# Altium PCB Mach_driver.PcbDoc
Units mm, origin at the board's own origin, x right, y up, seen from the top; angles counter-clockwise.
Board outline 152.4 x 101.6 mm, 2 copper layers (Top Layer, Bottom Layer); 76 components, 33 nets, 233 pads, 88 vias.
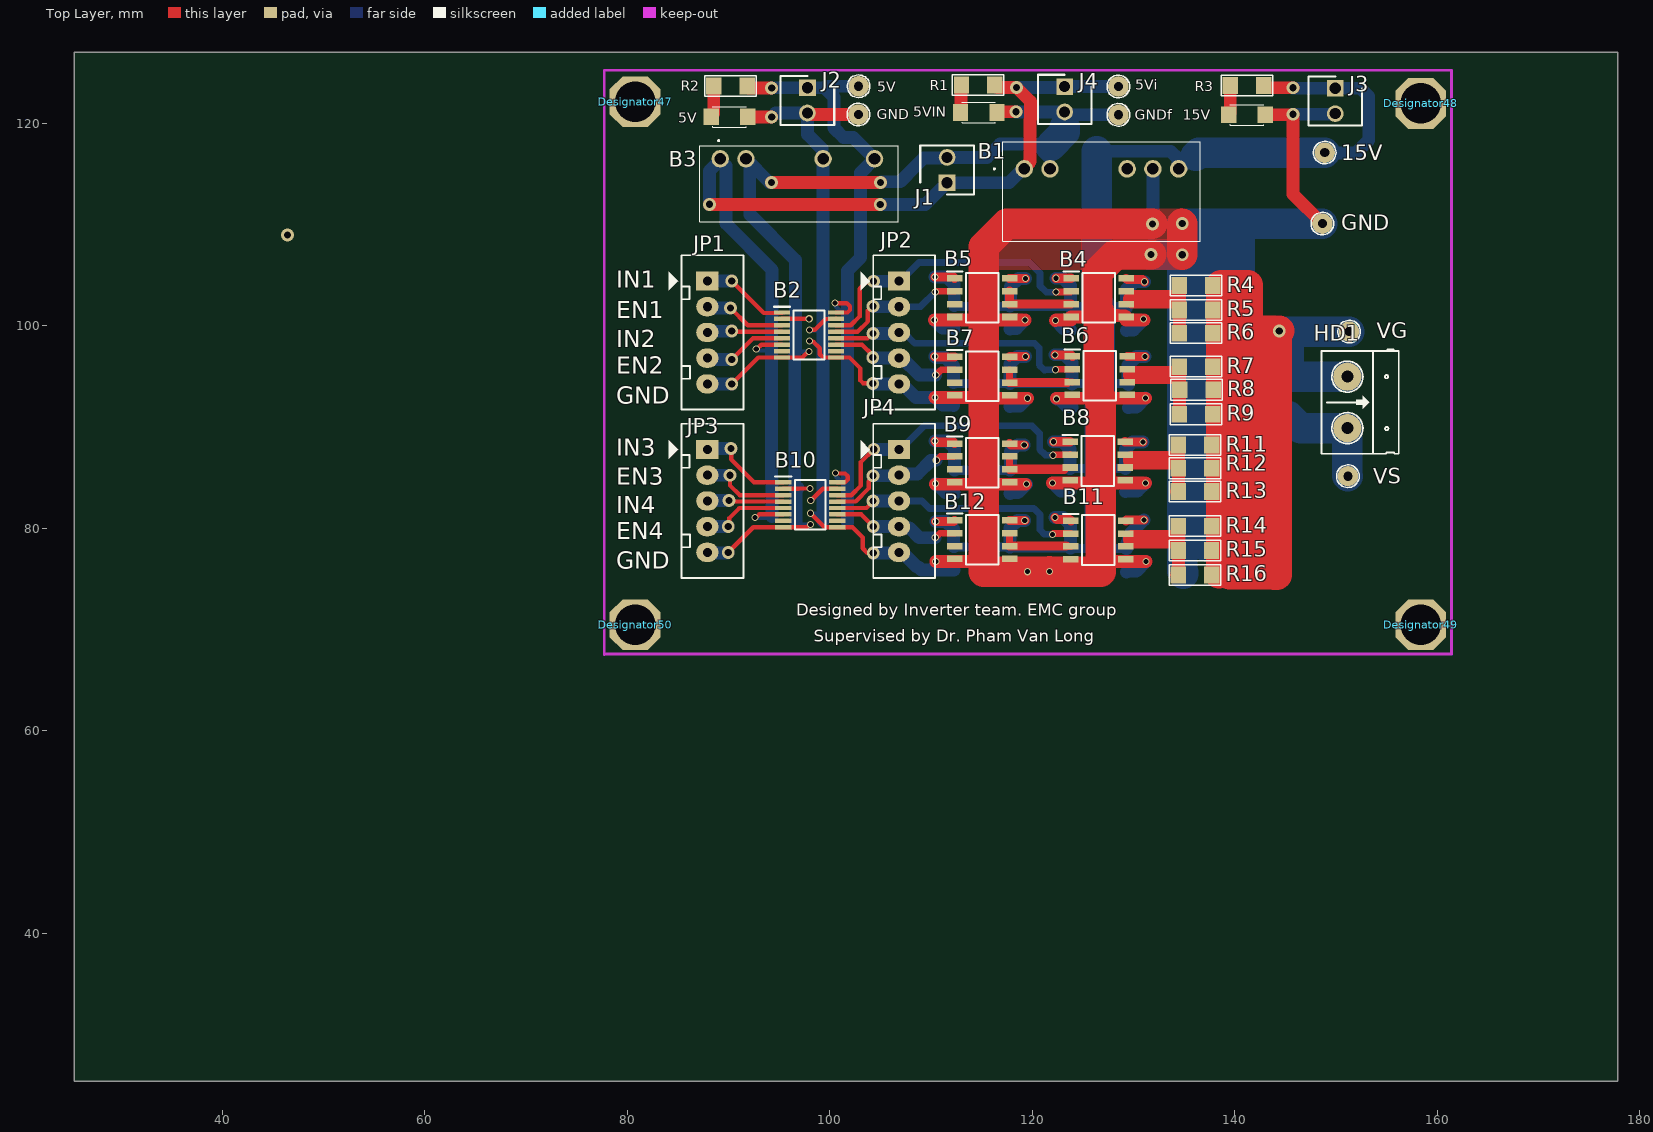
[diagram p0: Top Layer view]
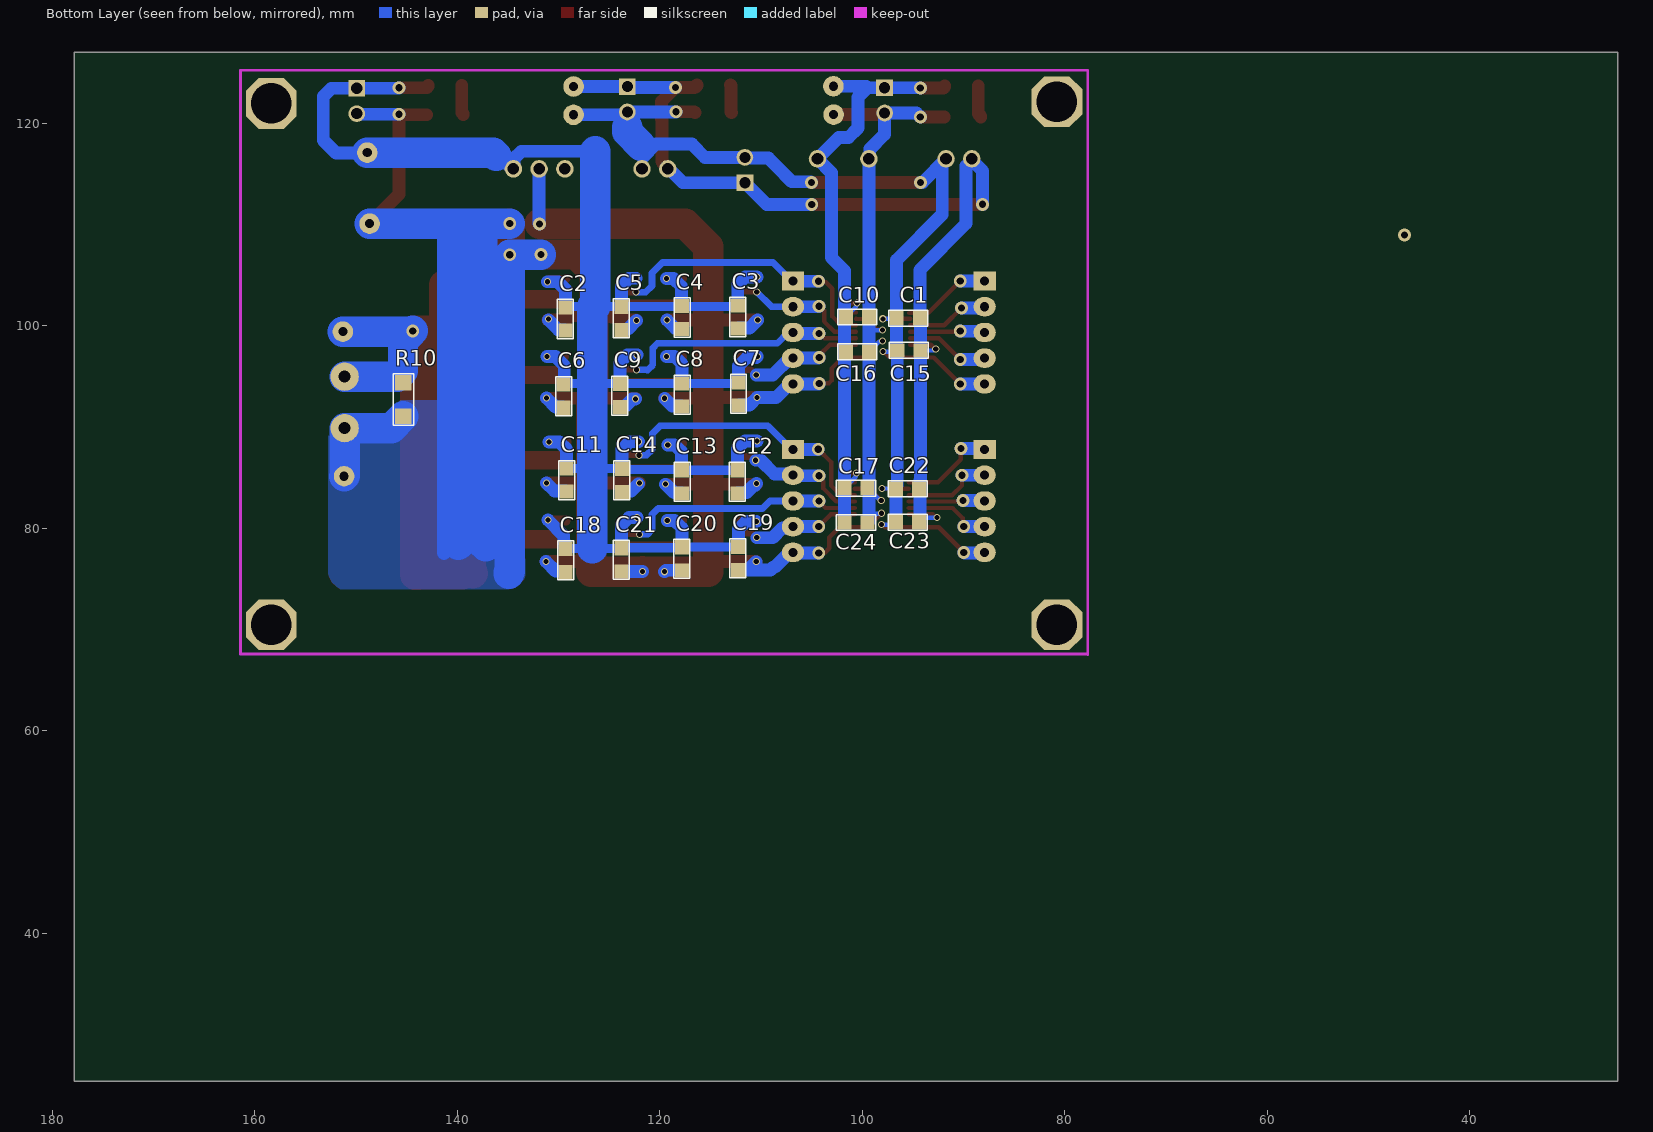
[diagram p1: Bottom Layer view, seen from below]
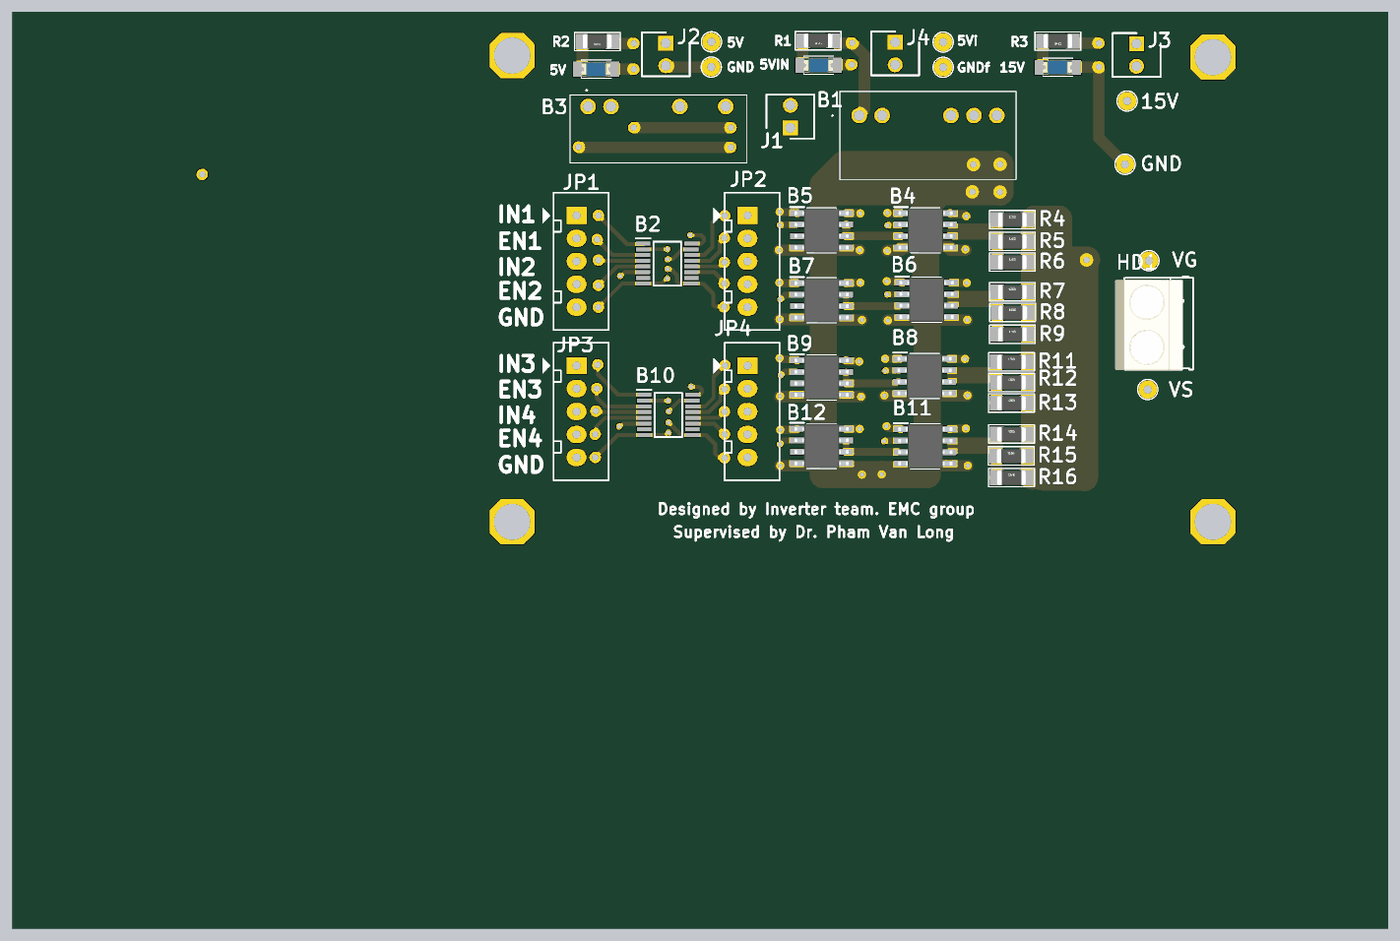
[diagram p2: 3D render of the assembled board from above, using the file's embedded part models]
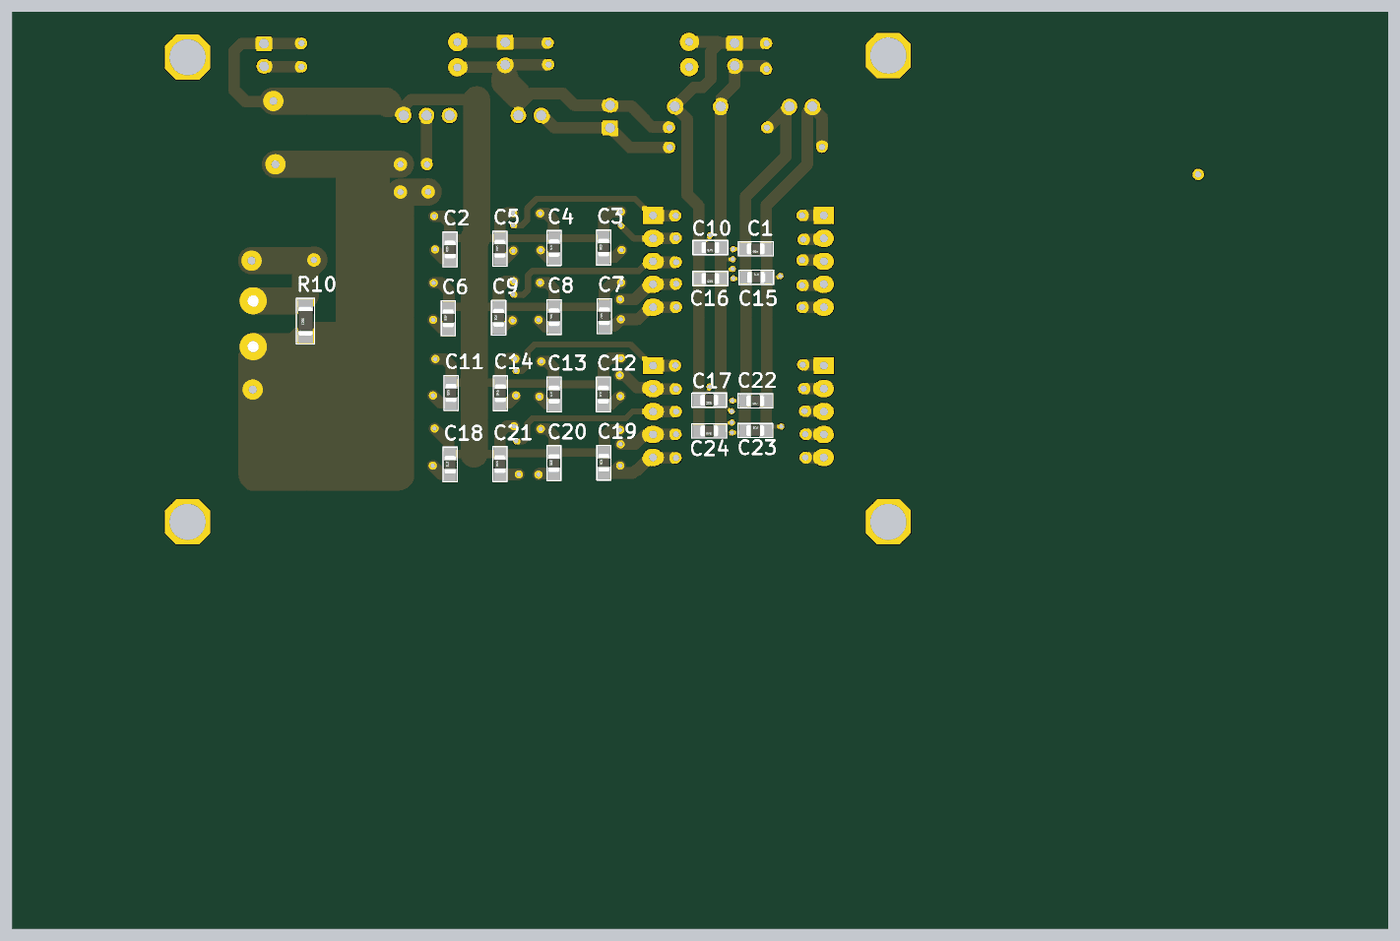
[diagram p3: 3D render of the assembled board from below, using the file's embedded part models]

## Layer stack, top to bottom
Top Solder: solder mask 0.0102, Solder Resist, Dk 3.5
Top Layer: signal copper 0.0356
Dielectric 1: dielectric 0.32, FR-4, Dk 4.8
Bottom Layer: signal copper 0.0356
Bottom Solder: solder mask 0.0102, Solder Resist, Dk 3.5

## Board outline
25.4,25.4 177.8,25.4 177.8,127 25.4,127

## Design rules (kind name [scope] priority, off if disabled: settings)
Clearance Clearance_1 [InPolygon] p1: gap=0.4 ignorepadtopadclearanceinfootprint=FALSE
Clearance [All] p2: gap=0.15 ignorepadtopadclearanceinfootprint=FALSE
PolygonConnect [All] p1: connectstyle=Relief reliefconductorwidth=0.254 reliefentries=4 polygonreliefangle="90 Angle" airgapwidth=0.254
RoutingVias [All] p1: holewidth=0.711 width=1.27 viastyle="Through Hole" minholewidth=0.711 minwidth=1.27 maxholewidth=0.711 maxwidth=1.27
SolderMaskExpansion [All] p1: expansion=0.102 istentingtop=FALSE
Width Width_1 [All] p1: maxlimit=3 minlimit=0.67 preferedwidth=1.27
Width Width_0.9 [All] p2: maxlimit=3 minlimit=0.9 preferedwidth=1.27
30 further rules are at their usual default settings.

## Classes and differential pairs
component class Mach_driver: 5V 5Vi 5VIN 15V B1 B2 B3 B4 B5 B6 B7 B8 B9 B10 B11 B12 C1 C2 C3 C4 C5 C6 C7 C8 C9 C10 C11 C12 C13 C14 C15 C16 C17 C18 C19 C20 C21 C22 C23 C24 GND GNDf HD1 J1 J2 J3 J4 JP1 JP2 JP3 JP4 R1 R2 R3 R4 R5 R6 R7 R8 R9 R10 R11 R12 R13 R14 R15 R16 VG VS

## Components (designator, comment, footprint, x,y, rotation, side; value= is the part's Value field where it differs from the comment)
5V "TP" TP1 102.845,123.647 r0 top value="Test Point"
5V "LED SMD" SM-LED-1206-Blue 88.29,120.625 r0 top
5Vi "TP" TP1 128.499,123.622 r0 top value="Test Point"
5VIN "LED SMD" SM-LED-1206-Blue 112.903,121.056 r0 top
15V "TP" TP1 148.869,117.094 r0 top value="Test Point"
15V "LED SMD" SM-LED-1206-Blue 139.395,120.828 r0 top
B1 "MGJ2D151505SC" MGJ2D151505SC 119.202,115.494 r0 top
B2 "IL260-1E" SOP64P600X175-16N 97.942,99.085 r0 top
B3 "RKZ3-2412S" RKZ32412S 89.179,116.484 r0 top
B4 "IXDD609SIA" SOIC127P600X175-8N 126.543,102.768 r0 top
B5 "IXDD609SIA" SOIC127P600X175-8N 115.037,102.768 r0 top
B6 "IXDD609SIA" SOIC127P600X175-8N 126.67,95.072 r0 top
B7 "IXDD609SIA" SOIC127P600X175-8N 115.037,95.021 r0 top
B8 "IXDD609SIA" SOIC127P600X175-8N 126.441,86.639 r0 top
B9 "IXDD609SIA" SOIC127P600X175-8N 115.037,86.462 r0 top
B10 "IL260-1E" SOP64P600X175-16N 98.069,82.321 r0 top
B11 "IXDD609SIA" SOIC127P600X175-8N 126.517,78.842 r0 top
B12 "IXDD609SIA" SOIC127P600X175-8N 115.037,78.879 r0 top
C1 "1uF" SM-0805 95.453,100.736 r180 bottom
C2 "1uF" SM-0805 129.311,100.66 r270 bottom
C3 "1uF" SM-0805 112.293,100.863 r270 bottom
C4 "1uF" SM-0805 117.78,100.813 r270 bottom
C5 "1uF" SM-0805 123.774,100.736 r270 bottom
C6 "1uF" SM-0805 129.489,93.04 r270 bottom
C7 "1uF" SM-0805 112.217,93.269 r270 bottom
C8 "1uF" SM-0805 117.78,93.167 r270 bottom
C9 "1uF" SM-0805 123.927,93.091 r270 bottom
C10 "1uF" SM-0805 100.482,100.863 r180 bottom
C11 "1uF" SM-0805 129.184,84.76 r270 bottom
C12 "1uF" SM-0805 112.319,84.582 r270 bottom
C13 "1uF" SM-0805 117.78,84.582 r270 bottom
C14 "1uF" SM-0805 123.723,84.734 r270 bottom
C15 "1uF" SM-0805 95.402,97.561 r0 bottom
C16 "1uF" SM-0805 100.482,97.434 r180 bottom
C17 "1uF" SM-0805 100.609,83.972 r180 bottom
C18 "1uF" SM-0805 129.286,76.835 r270 bottom
C19 "1uF" SM-0805 112.268,77.038 r270 bottom
C20 "1uF" SM-0805 117.805,76.987 r270 bottom
C21 "1uF" SM-0805 123.774,76.886 r270 bottom
C22 "1uF" SM-0805 95.504,83.896 r180 bottom
C23 "1uF" SM-0805 95.504,80.594 r0 bottom
C24 "1uF" SM-0805 100.609,80.569 r180 bottom
Designator47 "Comment" VIT 80.772,122.123 r0 top
Designator48 "Comment" VIT 158.369,121.945 r0 top
Designator49 "Comment" VIT 158.369,70.485 r0 top
Designator50 "Comment" VIT 80.772,70.485 r0 top
GND "TP" TP1 148.641,110.084 r90 top value="Test Point"
GND "TP" TP1 102.819,120.853 r0 top value="Test Point"
GNDf "TP" TP1 128.499,120.828 r0 top value="Test Point"
HD1 "Header 2" HED2 151.105,94.971 r270 top
J1 "22-11-1021" HDRV2W64P0X250_1X2_450X490X1105P 111.582,114.122 r90 top
J2 "22-11-1021" HDRV2W64P0X250_1X2_450X490X1105P 97.79,123.506 r270 top
J3 "22-11-1021" HDRV2W64P0X250_1X2_450X490X1105P 149.911,123.444 r270 top
J4 "22-11-1021" HDRV2W64P0X250_1X2_450X490X1105P 123.19,123.607 r270 top
JP1 "JP5" CON5 87.909,104.419 r270 top value="Connector 5"
JP2 "JP5" CON5 106.832,104.419 r270 top value="Connector 5"
JP3 "JP5" CON5 87.909,87.782 r270 top value="Connector 5"
JP4 "JP5" CON5 106.832,87.782 r270 top value="Connector 5"
R1 "2k" SM-1206 114.656,123.774 r180 top value=1K
R2 "2k" SM-1206 90.195,123.673 r180 top value=1K
R3 "2k" SM-1206 141.199,123.723 r180 top value=1K
R4 "1K" SM-1206 136.169,103.962 r0 top
R5 "1K" SM-1206 136.169,101.549 r0 top
R6 "1K" SM-1206 136.169,99.263 r0 top
R7 "1K" SM-1206 136.169,95.961 r0 top
R8 "1K" SM-1206 136.195,93.675 r0 top
R9 "1K" SM-1206 136.169,91.262 r0 top
R10 "5k1" SM-1206 145.313,92.71 r90 bottom value=1K
R11 "1K" SM-1206 136.068,88.214 r0 top
R12 "1K" SM-1206 136.068,85.928 r0 top
R13 "1K" SM-1206 136.068,83.642 r0 top
R14 "1K" SM-1206 136.068,80.213 r0 top
R15 "1K" SM-1206 136.042,77.8 r0 top
R16 "1K" SM-1206 136.068,75.387 r0 top
VG "TP" TP1 151.282,99.416 r0 top value="Test Point"
VS "TP" TP1 151.155,85.141 r0 top value="Test Point"

## Footprints (in the part's own frame and the unit in brackets; to place one, negate y for a bottom-side part, rotate by r counter-clockwise, add the part's x,y. Pads: shape width x height; smd on the part's side, far side on the other; paste and mask are expansions set on the pad)
CON5 [mm] "CON5"
  rect 1.9x2.2 hole 0.9: 1(0,0)
  oval 1.9x2.2 hole 0.9: 2(2.54,0) 3(5.08,0) 4(7.62,0) 5(10.16,0)
  silkscreen extent -2.54,-3.8 12.7,3.56
HDRV2W64P0X250_1X2_450X490X1105P [mm]
  rect 1.65x1.65 / inner round 1.65 / far side rect 1.65x1.65 hole 1.1: 1(0,0)
  round 1.65 hole 1.1: 2(2.5,0)
  silkscreen extent -1.17,-2.65 3.67,2.65
HED2 [mm] "Header 2, 2 pin, hight 300mil, Pin to Pin 200, Colour Green"
  round 2.8 hole 1.2: 1(0,0) 2(5.08,0)
  silkscreen extent -2.69,-2.54 7.62,5.08, body extent -2.33,-3.56 7.67,3.94, height 10
MGJ2D151505SC [mm]
  round 1.725 hole 1.15: 1(0,0) 2(2.54,0) 5(10.16,0) 6(12.7,0) 7(15.24,0)
  silkscreen extent -3,-7.13 17.37,2.67
RKZ32412S [mm]
  round 1.725 hole 1.15: 1(0,0) 2(2.54,0) 5(10.16,0) 7(15.24,0)
  silkscreen extent -2,-6.23 17.6,1.85
SM-0805 [mil] "Compoment SMD 80x50mil"
  rect 55x55 smd: 1(-45,0) 2(45,0)
  silkscreen extent -76,-31 76,31, body extent -39,-25 39,25, height 31
SM-1206 [mil] "Compoment SMD 120x60mil"
  rect 60x65 smd: 1(-65,0) 2(65,0)
  silkscreen extent -100,-40 100,40, body extent -63,-32 63,31, height 39
SM-LED-1206-Blue [mil] "Compoment SMD 120x60mil"
  rect 60x65 smd: 1(0,0) 2(142,0)
  silkscreen extent 6,-40 136,40, body extent 7,-31 133,32, height 43
SOIC127P600X175-8N [mm]
  rect 1.525x0.65 smd: 1(-2.712,1.905) 2(-2.712,0.635) 3(-2.712,-0.635) 4(-2.712,-1.905) 5(2.712,-1.905) 6(2.712,-0.635) 7(2.712,0.635) 8(2.712,1.905)
  silkscreen extent -3.47,-2.45 1.6,2.58, body extent -3,-2.45 3,2.45, height 1.75
SOP64P600X175-16N [mm]
  rect 1.6x0.435 smd: 1(-2.675,2.222) 2(-2.675,1.588) 3(-2.675,0.952) 4(-2.675,0.318) 5(-2.675,-0.318) 6(-2.675,-0.952) 7(-2.675,-1.588) 8(-2.675,-2.222) 9(2.675,-2.222) 10(2.675,-1.588) 11(2.675,-0.952) 12(2.675,-0.318) 13(2.675,0.318) 14(2.675,0.952) 15(2.675,1.588) 16(2.675,2.222)
  silkscreen extent -3.47,-2.44 1.53,2.79
TP1 [mil] "Test point"
  round 80 hole 35.43: 1(0,0)
  silkscreen extent -44,-44 44,44
VIT [mm] "VIT"
  oct 5x5 hole 4: 1(0,0)

## Part data
5V 5Vi 15V GND GND GNDf VG VS: library part TP1, "Test Point"
5V 5VIN 15V: library part LED-SMD-1206
B1: "DC/DC Converters", Manufacturer_Name="Murata Electronics", RS Part Number=8163516P, Datasheet Link=http://uk.rs-online.com/web/p/products/8163516P, Geometry.Height=12.75mm, Manufacturer_Part_Number=MGJ2D151505SC, RS Price/Stock=http://uk.rs-online.com/web/p/products/8163516P
B2 B10: "High Speed Five-Channel Digital Isolator, 110Mbps, unidirectional", Manufacturer_Name=NVE, Datasheet Link=https://www.nve.com/Downloads/il260-1.pdf, Geometry.Height=1.75mm, Manufacturer_Part_Number=IL260-1E
B3: "Isolated DC/DC Converters 3W 24Vin 12Vout 250mA SIP7", Manufacturer_Name="RECOM Power", RS Part Number=1655090P, Datasheet Link=http://uk.rs-online.com/web/p/products/1655090P, Geometry.Height=12.2mm, Manufacturer_Part_Number=RKZ3-2412S, RS Price/Stock=http://uk.rs-online.com/web/p/products/1655090P
B4 B5 B6 B7 B8 B9 B11 B12: "Gate Drivers 9-Ampere Low-Side Ultrafast MOSFET", Manufacturer_Name=LITTELFUSE, Datasheet Link=http://www.ixysic.com/home/pdfs.nsf/www/IXD_609.pdf/$file/IXD_609.pdf, Geometry.Height=1.75mm, Manufacturer_Part_Number=IXDD609SIA
C1 C2 C3 C4 C5 C6 C7 C8 C9 C10 C11 C12 C13 C14 C15 C16 C17 C18 C19 C20 C21 C22 C23 C24: library part C0805, "CapacitorStandard 0805 ceramic capacitor"
HD1: library part Hed2, "Header 2 (Green)"
J1 J2 J3 J4: "Headers & Wire Housings KK2.5MM FL WAF.ASS. GOLD 504502AG", Manufacturer_Name=Molex, Allied_Number=70777791, Datasheet Link=https://www.molex.com/pdm_docs/sd/022111021_sd.pdf, Geometry.Height=11.05mm, Manufacturer_Part_Number=22-11-1021
JP1 JP2 JP3 JP4: library part Con5, "Connector 5"
R1 R2 R3 R4 R5 R6 R7 R8 R9 R10 R11 R12 R13 R14 R15 R16: library part RM, "Resistor SMD"

## Via types
v1: diameter 0.7, hole 0.5, Top Layer to Bottom Layer, 52 vias
v2: diameter 1.27, hole 0.711, Top Layer to Bottom Layer, 36 vias

## Nets (pads, with @x,y where several pads share a name; then routed paths per layer and width w, separated by ;. In a path a pad name is that pad's centre, name@x,y a point inside that pad or via, vN(x,y) a via of type N, cw(c..) or ccw(c..) an arc to the next point about the centre after c; other vN are vias at no path point)
5VDC: 5Vi.1 B1.1 B2.6 B3.1 B10.6 C1.2 C15.1 C22.2 C23.1 J1.1 J4.1 R1.1 | length 103.8
  Top Layer w0.43: v1(92.631,81.048) 92.704,81.048 93.025,81.369 B10.6 ; v1(92.735,97.714) 92.808,97.714 93.228,98.133 B2.6
  Top Layer w1.27: v2(88.113,111.989) 88.138,111.963 v2(104.978,111.963) ; R1.1 116.307,123.711 116.434,123.584 116.497,123.584 116.561,123.52 v2(118.44,123.52) 119.809,122.151 119.809,120.399 119.786,120.376 119.786,116.201 119.202,115.617 B1.1
  Bottom Layer w0.43: v1(92.631,81.048) C23.1@93.907,81.048 ; v1(92.735,97.714) 92.808,97.714 92.961,97.561 C15.1
  Bottom Layer w1.27: v2(88.113,111.989) 88.113,115.294 89.179,116.361 B3.1 ; 89.738,115.802 89.738,110.084 94.31,105.512 C1.2 ; C1.2@94.259,100.686 C15.1 94.259,84.776 94.297,84.738 C22.2@94.297,83.833 ; C23.1@94.285,81.169 C22.2@94.285,83.82 ; v2(104.978,111.963) 109.423,111.963 J1.1 117.707,114.122 119.079,115.494 B1.1 B1.1@119.289,115.407 ; v2(118.44,123.52) 123.103,123.52 J4.1 123.197,123.615 128.491,123.615 5Vi.1
5VDC_ISO: 5V.1@102.845,123.647 B2.16 B3.7 B10.16 C10.1 C16.1 C17.1 C24.1 J2.1 R2.1 | length 67.9
  Top Layer w0.43: v1(100.508,102.235) 101.676,102.235 101.996,101.916 101.996,101.559 101.744,101.307 B2.16 ; v1(100.581,85.467) 100.633,85.416 101.503,85.416 101.767,85.152 101.767,84.82 101.493,84.546 100.747,84.546 B10.16
  Top Layer w1.27: R2.1 91.846,123.609 91.973,123.482 92.037,123.482 92.05,123.469 v2(94.259,123.469)
  Bottom Layer w0.43: v1(100.508,102.235) 100.559,102.183 100.559,101.929 C10.1 ; v1(100.581,85.467) 100.633,85.416 100.633,85.092 C17.1
  Bottom Layer w1.27: v2(94.259,123.469) 94.296,123.506 J2.1 99.481,123.506 ; C24.1 C17.1 101.752,105.435 103.048,106.731 103.048,115.113 B3.7 102.311,118.593 101.346,118.593 100.432,119.507 100.432,122.555 99.481,123.506 ; 5V.1@102.845,123.647 99.623,123.647 99.481,123.506
15VDC: 15V.1@148.869,117.094 B1.7 B4.1 B4.8 B5.1 B5.8 B6.1 B6.8 B7.1 B7.8 B8.1 B8.8 B9.1 B9.8 B11.1 B11.8 B12.1 B12.8 C2.1 C3.1 C4.1 C5.1 C6.1 C7.1 C8.1 C9.1 C11.1 C12.1 C13.1 C14.1 C18.1 C19.1 C20.1 C21.1 J3.1 R3.1 | length 242.4
  Top Layer w0.9: v1(110.363,96.977) 110.414,96.926 B7.1 ; v1(110.383,88.614) 110.505,88.492 112.2,88.492 B9.1 ; v1(110.388,104.826) 110.416,104.798 112.2,104.798 B5.1 ; v1(110.465,80.67) 112.211,80.67 B12.1 ; B12.8 117.761,80.772 v1(119.253,80.772) ; B9.8 117.874,88.242 119.2,88.242 v1(119.202,88.24) ; B7.8 117.799,96.977 v1(119.329,96.977) ; B5.8 117.774,104.648 v1(119.329,104.648) ; v1(122.072,88.544) B8.1 ; v1(122.225,81.077) 122.43,80.872 123.68,80.872 B11.1 ; v1(122.25,97.13) 122.278,97.102 123.833,97.102 B6.1 ; v1(122.323,104.688) 123.816,104.688 B4.1 ; B8.8 129.178,88.52 v1(130.925,88.52) ; B11.8 129.306,80.823 v1(131.013,80.823) ; B4.8 129.38,104.548 130.859,104.548 v1(131.064,104.343) ; B6.8 129.407,96.952 v1(131.115,96.952)
  Top Layer w1.27: R3.1 142.85,123.66 142.977,123.533 143.04,123.533 143.078,123.495 v2(145.745,123.495)
  Bottom Layer w0.9: C7.1 112.331,94.297 C9.1@123.927,94.297 ; C19.1 112.293,78.156 C20.1@117.78,78.156 ; C3.1 112.395,101.905 123.774,101.905 126.644,101.905 129.21,101.905 C2.1 ; C12.1 C13.1 ; C13.1@117.843,85.788 117.856,85.801 123.647,85.801 C14.1 123.736,85.89 126.644,85.89 129.172,85.89 C11.1 ; C20.1@117.856,78.08 123.723,78.08 C21.1 123.8,78.003 126.644,78.003 129.261,78.003 C18.1 ; C9.1@123.99,94.297 126.644,94.297 129.375,94.297 C6.1@129.426,94.247
  Bottom Layer w1.27: v1(110.363,96.977) 110.467,96.873 111.374,96.873 112.217,96.03 C7.1 ; v1(110.383,88.614) 111.575,88.614 112.319,87.87 C12.1 ; v1(110.388,104.826) 111.549,104.826 112.293,104.082 C3.1 ; v1(110.465,80.67) 111.461,80.67 112.204,79.926 112.204,78.245 C19.1 ; C13.1 117.843,85.788 117.843,86.287 117.856,86.3 117.856,87.572 118.524,88.24 v1(119.202,88.24) ; C8.1 117.78,96.233 118.524,96.977 v1(119.329,96.977) ; C4.1 117.843,102.019 117.843,103.873 118.618,104.648 v1(119.329,104.648) ; C20.1 117.805,80.028 118.549,80.772 v1(119.253,80.772) ; v1(122.072,88.544) 122.979,88.544 123.723,87.8 C14.1 ; v1(122.225,81.077) 123.03,81.077 123.774,80.333 C21.1 ; v1(122.25,97.13) 123.183,97.13 123.927,96.386 123.927,94.297 C9.1 ; v1(122.323,104.688) 123.03,104.688 123.774,103.944 123.774,101.905 C5.1 ; 126.365,117.229 133.654,117.229 134.355,116.528 134.355,115.581 B1.7 134.565,115.494 135.861,116.789 136.119,116.789 ; C11.1 129.184,87.8 129.904,88.52 v1(130.925,88.52) ; C18.1 129.35,78.041 129.35,78.54 129.464,78.655 129.464,79.273 v1(131.013,80.823) ; C2.1 129.311,103.599 130.055,104.343 v1(131.064,104.343) ; C6.1 129.426,94.247 129.426,96.075 130.302,96.952 v1(131.115,96.952) ; v2(145.745,123.495) 145.796,123.444 J3.1 152.4,123.444 153.213,122.631 153.213,118.313 151.943,117.043 148.92,117.043 15V.1@148.869,117.094
  Bottom Layer w3: 126.365,101.905 126.365,117.229 ; 126.644,78.003 126.644,85.89 126.644,94.297 126.644,101.905 ; 136.119,116.789 136.423,117.094 15V.1@148.869,117.094
EN1: B2.3 JP1.2 | length 8.1
  Top Layer w0.43: v2(90.195,101.752) 91.901,100.046 93.289,100.046 93.298,100.037 B2.3
  Bottom Layer w1.27: JP1.2 88.03,101.759 90.189,101.759 v2(90.195,101.752)
EN1_ISO: B2.13 B5.2 JP2.2 | length 14
  Top Layer w0.43: B2.13 102.731,99.403 103.759,100.432 103.759,101.498 104.191,101.93 v2(104.267,101.93)
  Top Layer w0.67: v1(110.411,103.342) 110.419,103.342 110.48,103.403 B5.2
  Bottom Layer w0.67: JP2.2 108.948,101.879 v1(110.411,103.342)
  Bottom Layer w1.27: v2(104.267,101.93) 104.318,101.879 JP2.2
EN2: B2.5 JP1.4 | length 8.3
  Top Layer w0.43: v2(90.322,96.672) 92.417,98.767 B2.5
  Bottom Layer w1.27: JP1.4 88.03,96.679 90.316,96.679 v2(90.322,96.672)
EN2_ISO: B2.11 B7.2 JP2.4 | length 13.3
  Top Layer w0.43: B2.11 103.187,98.133 104.242,97.079 v2(104.242,96.876)
  Top Layer w0.67: v1(110.465,95.123) 110.473,95.123 110.996,95.646 112.315,95.646 B7.2
  Bottom Layer w1.27: v2(104.242,96.876) 104.318,96.799 107.153,96.799 108.829,95.123 v1(110.465,95.123)
EN3: B10.3 JP3.2 | length 8.9
  Top Layer w0.43: v2(90.145,85.242) 90.145,84.226 91.098,83.273 B10.3
  Bottom Layer w1.27: JP3.2 v2(90.145,85.242)
EN3_ISO: B9.2 B10.13 JP4.2 | length 13.9
  Top Layer w0.43: B10.13 102.553,82.639 103.835,83.922 103.835,84.658 104.267,85.09 v2(104.267,85.192)
  Top Layer w0.67: v1(110.515,86.716) 110.524,86.716 110.905,87.097 B9.2
  Bottom Layer w1.27: v2(104.267,85.192) 106.782,85.192 JP4.2 106.953,85.363 108.655,85.363 110.007,86.716 v1(110.515,86.716)
EN4: B10.5 JP3.4 | length 8.7
  Top Layer w0.43: v2(89.967,80.188) 90.086,80.307 90.086,81.018 91.071,82.003 B10.5
  Bottom Layer w1.27: JP3.4 87.935,80.188 v2(89.967,80.188)
EN4_ISO: B10.11 B12.2 JP4.4 | length 12.7
  Top Layer w0.43: B10.11 103.111,81.369 v2(104.292,80.188)
  Top Layer w0.67: v1(110.414,79.07) 110.422,79.07 110.856,79.504 112.315,79.504 B12.2
  Bottom Layer w1.27: v2(104.292,80.188) 104.318,80.162 JP4.4 106.953,80.042 107.867,80.042 108.839,79.07 v1(110.414,79.07)
GND: 5V.2 15V.2 B1.6 B2.9 B2.15 B3.5 B4.4 B4.5 B5.4 B5.5 B6.4 B6.5 B7.4 B7.5 B8.4 B8.5 B9.4 B9.5 B10.9 B10.15 B11.4 B11.5 B12.4 B12.5 C2.2 C3.2 C4.2 C5.2 C6.2 C7.2 C8.2 C9.2 C10.2 C11.2 C12.2 C13.2 C14.2 C16.2 C17.2 C18.2 C19.2 C20.2 C21.2 C24.2 GND.1 HD1.2 J2.2 J3.2 JP2.5 JP4.5 R10.1 VS.1 | length 470.2
  Top Layer w0.43: v1(97.993,98.501) 98.045,98.45 98.35,98.45 99.008,97.791 99.008,97.182 99.324,96.866 100.615,96.866 B2.9 100.62,96.861 101.945,96.861 103.022,95.783 103.022,94.59 103.274,94.338 104.189,94.338 v2(104.242,94.285) ; v1(97.993,99.568) 98.013,99.588 98.521,99.588 99.604,100.671 100.615,100.671 B2.15 ; v1(98.095,81.483) 99.479,80.099 B10.9 102.247,80.099 103.251,79.096 103.251,78.029 103.708,77.572 v2(104.292,77.572) ; v1(98.12,82.728) 99.302,83.909 B10.15
  Top Layer w1.27: 5V.2 v2(94.259,120.625) ; J2.2 97.893,121.006 98.045,120.853 GND.1@102.819,120.853 ; v1@110.338,100.584 114.884,100.584 ; v1(110.388,92.913) 115.011,92.913 115.214,93.116 115.494,92.837 v1(119.507,92.837) ; v1@110.414,84.353 115.202,84.353 115.214,84.366 115.227,84.353 v1@119.351,84.353 ; v1(110.465,76.708) 114.122,76.708 ; 115.545,100.584 117.749,100.584 117.764,100.568 v1(119.263,100.568) ; v1@121.996,84.455 126.56,84.455 126.741,84.275 126.921,84.455 v1@131.166,84.455 ; v1(122.301,100.508) 122.347,100.553 123.8,100.553 B4.4@123.831,100.584 ; v1@122.399,92.837 126.741,92.837 v1@131.162,92.837 ; B4.4 124.758,100.863 ; 125.745,76.708 126.741,75.712 127.737,76.708 v1@131.213,76.708 ; 128.167,101.023 128.467,101.023 128.499,100.991 129.127,100.991 B4.5 ; B4.5@129.255,100.584 v1@131.01,100.584 ; 15V.2 145.694,120.828 v2(145.745,120.879) 145.745,112.979 GND.1@148.641,110.084
  Top Layer w3: 115.214,100.863 115.214,93.116 115.214,84.366 115.214,75.712 121.661,75.712 v1(121.691,75.743) 121.722,75.712 126.741,75.712 126.741,84.275 126.741,92.837 ; 115.214,100.914 115.214,107.793 117.48,110.058 v2(131.851,110.058) ; 126.422,101.483 126.422,105.262 128.196,107.036 v2(131.724,107.036) ; 126.569,92.837 126.569,101.483 ; v2(134.798,107.01) v2(134.798,110.084)
  Bottom Layer w0.43: v1(97.993,98.501) 98.045,98.45 98.324,98.45 C16.2 ; v1(97.993,99.568) 99.111,99.568 99.339,99.797 ; v1(98.095,81.483) 98.146,81.432 98.604,81.432 99.339,80.696 C24.2 ; v1(98.12,82.728) 98.172,82.779 98.273,82.779 99.339,83.845 C17.2
  Bottom Layer w1.27: v2(94.259,120.625) 94.64,121.006 J2.2 97.79,118.897 99.252,117.435 99.252,116.571 B3.5 C10.2 99.339,99.797 C16.2 C17.2@99.339,83.972 ; C24.2@99.339,80.696 C17.2@99.339,83.845 ; v2(104.242,94.285) 104.267,94.259 JP2.5 107.153,94.259 108.499,92.913 v1(110.388,92.913) 111.112,92.189 112.154,92.189 C7.2 ; v2(104.292,77.572) 106.782,77.572 JP4.5 107.153,77.622 108.575,76.2 108.737,76.2 109.042,75.895 C19.2 ; v1(110.312,100.584) 111.112,99.784 112.23,99.784 C3.2 ; v1(110.439,84.404) 110.602,84.242 110.703,84.242 111.442,83.502 112.255,83.502 C12.2 ; v1@110.475,76.698 111.214,75.959 ; C13.2 117.843,83.502 118.554,83.502 v1(119.405,84.353) ; C8.2 117.843,92.088 118.758,92.088 v1@119.497,92.827 ; C4.2 117.843,99.733 118.427,99.733 v1(119.263,100.568) ; C20.2 117.814,75.854 119.365,75.854 v1(119.507,75.712) ; v1(121.691,75.743) C21.2 ; v1@122.083,84.394 122.822,83.655 123.66,83.655 C14.2 ; v1(122.301,100.508) 123.152,99.657 123.711,99.657 C5.2 ; v1(122.377,92.786) 122.413,92.751 122.718,92.751 123.457,92.011 123.863,92.011 C9.2 ; C11.2 129.248,83.68 130.391,83.68 v1(131.191,84.48) ; C18.2 129.35,75.755 130.264,75.755 v1(131.216,76.708) ; C2.2 129.375,99.581 129.984,99.581 v1@130.962,100.559 ; C6.2 129.553,91.961 130.264,91.961 v1(131.166,92.862) ; v2(131.851,110.058) 131.902,110.109 B1.6 ; 141.3,77.521 141.351,77.572 141.351,110.084 ; v2(145.745,120.879) 149.845,120.879 J3.2
  Bottom Layer w3: v2(131.724,107.036) 131.75,107.01 v2(134.798,107.01) 134.798,75.768 134.899,75.667 134.899,75.489 ; v2(134.798,110.084) 137.49,110.084 ; 137.185,78.232 137.49,78.537 137.49,110.084 ; 139.878,78.359 139.751,78.486 139.751,110.084 ; R10.1 146.482,89.891 HD1.2 151.105,85.192 VS.1 ; GND.1@148.641,110.084 141.351,110.084 139.751,110.084 ; 137.49,110.084 139.751,110.084
  other v1: 121.996,84.48 130.962,100.66
GND_FPGA: 5VIN.2 B1.2 B2.2 B2.8 B3.2 B10.2 B10.8 C1.1 C15.2 C22.1 C23.2 GNDf.1 J1.2 J4.2 JP1.5 JP3.5 | length 118.8
  Top Layer w0.43: v2(89.967,77.622) 92.444,80.099 B10.8 97.756,80.099 98.022,80.366 v1(98.095,80.366) ; v2@90.322,94.259 92.926,96.863 B2.8 95.27,96.866 97.287,96.866 97.867,97.445 v1(97.94,97.445) ; B2.2 97.956,100.673 v1(97.968,100.686) ; B10.2 96.942,83.909 96.954,83.922 v1(98.044,83.922)
  Top Layer w1.27: v2(94.234,114.148) v2(105.004,114.148) ; 5VIN.2 116.586,121.133 v2(118.389,121.133)
  Bottom Layer w0.43: C15.2@96.662,97.445 v1(97.94,97.445) ; C23.2@96.672,80.594 96.901,80.366 v1(98.095,80.366) ; C22.1@96.672,83.922 v1(98.044,83.922) ; C1.1@96.901,100.686 v1(97.968,100.686)
  Bottom Layer w1.27: JP3.5 87.96,77.572 89.916,77.572 v2(89.967,77.622) ; JP1.5 v2@90.322,94.259 ; v2(94.234,114.148) 94.056,114.148 B3.2 91.719,116.361 92.1,115.98 92.1,110.998 96.596,106.502 C1.1 C15.2@96.596,97.612 ; C15.2 96.545,84.277 C22.1@96.85,83.972 ; C23.2@96.672,80.594 C22.1@96.672,83.871 ; v2(105.004,114.148) 105.08,114.224 106.952,114.224 107.696,114.968 107.696,114.986 109.26,116.549 111.509,116.549 J1.2 115.512,116.622 116.822,117.932 120.354,117.932 121.655,116.631 ; v2(118.389,121.133) 118.415,121.107 J4.2 123.293,121.107 123.572,120.828 GNDf.1
  Bottom Layer w3: 121.844,117.78 123.215,119.151 123.215,119.609
  other v2: 90.324,94.257
IN1: B2.1 JP1.1 | length 8.8
  Top Layer w0.43: v2(90.322,104.419) 93.486,101.256 B2.1@95.35,101.256
  Bottom Layer w1.27: JP1.1 v2(90.322,104.419)
IN1_ISO: B2.14 B4.2 JP2.1 | length 29.3
  Top Layer w0.43: B2.14 102.069,100.037 102.946,100.914 102.946,103.657 103.581,104.292 104.216,104.292 v2(104.318,104.394)
  Top Layer w0.67: v1(122.323,103.316) 122.331,103.316 122.358,103.343 123.795,103.343 B4.2@123.805,103.353
  Bottom Layer w0.67: JP2.1 106.982,104.419 108.811,106.248 119.71,106.248 120.752,105.207 120.752,103.937 121.372,103.316 v1(122.323,103.316)
  Bottom Layer w1.27: v2(104.318,104.394) 106.807,104.394 JP2.1
IN2: B2.4 JP1.3 | length 7.4
  Top Layer w0.43: v2(90.322,99.466) 90.385,99.403 B2.4
  Bottom Layer w1.27: JP1.3 88.03,99.46 90.316,99.46 v2(90.322,99.466)
IN2_ISO: B2.12 B6.2 JP2.3 | length 26.1
  Top Layer w0.43: B2.12 103.72,98.767 104.191,99.238 v2(104.267,99.238)
  Top Layer w0.67: v1(122.301,95.656) 122.309,95.656 122.35,95.697 123.948,95.697 B6.2
  Bottom Layer w0.67: JP2.3 107.315,99.339 108.382,98.273 120.218,98.273 120.675,97.815 120.675,96.139 121.209,95.606 121.254,95.651 122.295,95.651 v1(122.301,95.656)
  Bottom Layer w1.27: v2(104.267,99.238) 106.731,99.238 JP2.3
IN3: B10.1 JP3.1 | length 9.5
  Top Layer w0.43: v2(90.246,87.884) 90.264,87.866 90.264,86.799 92.52,84.543 B10.1
  Bottom Layer w1.27: JP3.1 88.011,87.884 v2(90.246,87.884)
IN3_ISO: B8.2 B10.14 JP4.1 | length 29.4
  Top Layer w0.43: B10.14 100.747,83.271 102.098,83.271 102.108,83.261 103.073,84.226 103.073,86.538 v2(104.343,87.808)
  Top Layer w0.67: v1(122.052,87.213) 122.06,87.213 122.111,87.264 123.719,87.264 B8.2
  Bottom Layer w0.67: JP4.1 106.982,87.782 109.319,90.119 119.964,90.119 120.726,89.357 120.726,87.794 121.301,87.219 122.046,87.219 v1(122.052,87.213)
  Bottom Layer w1.27: v2(104.343,87.808) 104.369,87.782 JP4.1
IN4: B10.4 JP3.3 | length 7.6
  Top Layer w0.43: v2(90.043,82.753) 90.154,82.642 95.392,82.642 B10.4
  Bottom Layer w1.27: JP3.3 87.96,82.753 v2(90.043,82.753)
IN4_ISO: B10.12 B11.2 JP4.3 | length 25.7
  Top Layer w0.43: B10.12 103.619,82.003 104.267,82.652 v2(104.267,82.702)
  Top Layer w0.67: v1(121.971,79.4) 121.979,79.4 122.055,79.477 B11.2
  Bottom Layer w0.67: JP4.3 109.118,82.702 109.855,81.966 120.142,81.966 120.752,81.356 120.752,79.858 121.203,79.406 121.965,79.406 v1(121.971,79.4)
  Bottom Layer w1.27: v2(104.267,82.702) JP4.3
Net5V_1: 5V.1@88.29,120.625 R2.2 | length 3.2
  Top Layer w1.27: 5V.1@88.29,120.625 88.29,120.688 88.544,120.942 R2.2
Net5VIN_1: 5VIN.1 R1.2 | length 2.8
  Top Layer w1.27: 5VIN.1 112.954,121.107 112.954,123.723 R1.2
Net15V_1: 15V.1@139.395,120.828 R3.2 | length 3
  Top Layer w1.27: 15V.1@139.395,120.828 139.395,120.891 139.548,121.044 R3.2
NetB4_3: B4.3 B5.6 B5.7 | length 7.4
  Top Layer w0.9: B5.7 B5.6 B4.3
NetB4_6: B4.6 B4.7 R4.1 R5.1 R6.1 | length 8.9
  Top Layer w1.27: R6.1 R5.1 R4.1
  Top Layer w1.8: 129.845,102.616 134.087,102.616
NetB6_3: B6.3 B7.6 B7.7 | length 7.5
  Top Layer w0.67: B7.6 B7.7 ; B6.3@123.489,94.386 123.54,94.437 B6.3
  Top Layer w0.9: B7.6 B6.3@123.489,94.386
NetB6_6: B6.6 B6.7 R7.1 R8.1 R9.1 | length 9.2
  Top Layer w1.27: R9.1 R7.1
  Top Layer w1.8: 129.845,95.148 R7.1@134.341,95.148
NetB8_3: B8.3 B9.6 B9.7 | length 7.3
  Top Layer w0.67: B9.6 B9.7 ; B8.3@123.134,85.827 123.312,86.004 B8.3
  Top Layer w0.9: B9.6 B8.3@123.134,85.827
NetB8_6: B8.6 B8.7 R11.1 R12.1 R13.1 | length 8.8
  Top Layer w1.27: R13.1@134.239,83.642 134.417,83.82 R12.1 R11.1
  Top Layer w1.8: 129.845,86.716 R12.1@133.985,86.716
NetB11_3: B11.3 B12.6 B12.7 | length 7.3
  Top Layer w0.67: B12.6 B12.7 ; B11.3@123.35,78.244 123.388,78.207 B11.3
  Top Layer w0.9: B12.6 B11.3@123.35,78.244
NetB11_6: B11.6 B11.7 R14.1 R15.1 R16.1 | length 9.3
  Top Layer w1.27: R16.1@134.239,75.387 134.417,75.565 R14.1
  Top Layer w1.8: 129.845,78.918 134.239,78.918
Vg: HD1.1 R4.2 R5.2 R6.2 R7.2 R8.2 R9.2 R10.2 R11.2 R12.2 R13.2 R14.2 R15.2 R16.2 VG.1 | length 108.5
  Top Layer w3: R16.2@138.43,75.565 138.633,75.768 138.633,77.8 138.633,80.213 138.633,83.642 138.633,85.928 138.633,88.214 138.633,91.262 138.633,93.675 138.633,95.961 138.633,99.263 138.633,101.549 138.633,104.025 141.289,104.025 141.289,99.67 ; 139.47,75.463 143.84,75.463 143.877,75.427 ; 141.199,75.717 141.289,75.807 141.289,99.67 ; 144.145,75.387 144.145,99.263 v2(144.374,99.492) 141.466,99.492 141.289,99.67
  Bottom Layer w3: v2(144.374,99.492) v2@144.45,99.416 ; HD1.1 145.923,94.971 145.339,95.555 145.339,98.527 v2@144.45,99.416 ; VG.1 v2@144.45,99.416
pads on no net: B1.5 B2.7 B2.10 B5.3 B7.3 B9.3 B10.7 B10.10 B12.3 Designator47.1 Designator48.1 Designator49.1 Designator50.1
copper on no net:
  other v2: 46.457,108.966

## Polygon pours and split planes (outlines as drawn)
GND on Bottom Layer "GND_L02_P000" (solid, remove dead copper, pour order 0): 145.694,92.558 ccw(c145.51,92.374) 145.51,92.634 140.056,92.634 140.056,90.079 cw(c139.969,90.079) 140.03,90.018 cw(c140.153,89.895) 140.153,90.068 145.72,90.068
GND on Bottom Layer "GND_L02_P002" (solid, remove dead copper, pour order 2): 133.325,77.038 ccw(c133.447,76.916) 133.274,76.916 133.274,75.427 ccw(c134.228,75.427) 133.553,74.752 133.874,74.432 ccw(c135.001,75.559) 135.001,73.965 141.518,73.965 ccw(c141.518,74.052) 141.58,73.99 141.723,74.133 ccw(c141.333,74.524) 141.884,74.524 141.884,77.692 cw(c142.145,77.692) 141.961,77.876
GND on Bottom Layer "GND_L02_P005" (solid, remove dead copper, pour order 5): 152.349,90.094 152.73,89.713 152.73,75.743 cw(c151.075,75.743) 152.245,74.572 151.892,74.219 cw(c151.279,74.832) 151.279,73.965 140.97,73.965 140.97,89.461 ccw(c140.363,89.461) 140.362,90.068
GND on Top Layer "GND_L01_P003" (solid, remove dead copper, pour order 3): 134.874,111.582 134.899,111.557 134.899,105.537 116.561,105.537 116.51,105.486 116.459,105.537 116.459,110.49 117.424,111.455

## Keep-outs
Keep-Out Layer:
  lines w0.254: 77.724,67.513 77.724,125.222 161.392,125.222 ; 77.724,67.589 161.417,67.589 ; 161.392,67.615 161.392,125.197

## Silkscreen, mask and mechanical layers (free items; w line width, h text height)
Top Overlay:
  text "IN1" at 78.911,103.727 h1.7
  text "EN1" at 78.911,100.755 h1.7
  text "IN2" at 78.911,97.885 h1.7
  text "EN2" at 78.911,95.244 h1.7
  text "GND" at 78.911,92.297 h1.7
  text "IN3" at 78.911,87.166 h1.7
  text "EN3" at 78.911,84.322 h1.7
  text "IN4" at 78.911,81.477 h1.7
  text "EN4" at 78.911,78.911 h1.7
  text "GND" at 78.911,75.99 h1.7
  text "Designed by Inverter team. EMC group" at 96.698,71.342 h1.2
  text "Supervised by Dr. Pham Van Long" at 98.425,68.802 h1.2